# EAGLE board Round Rev3 (EAGLE 9.0.1)
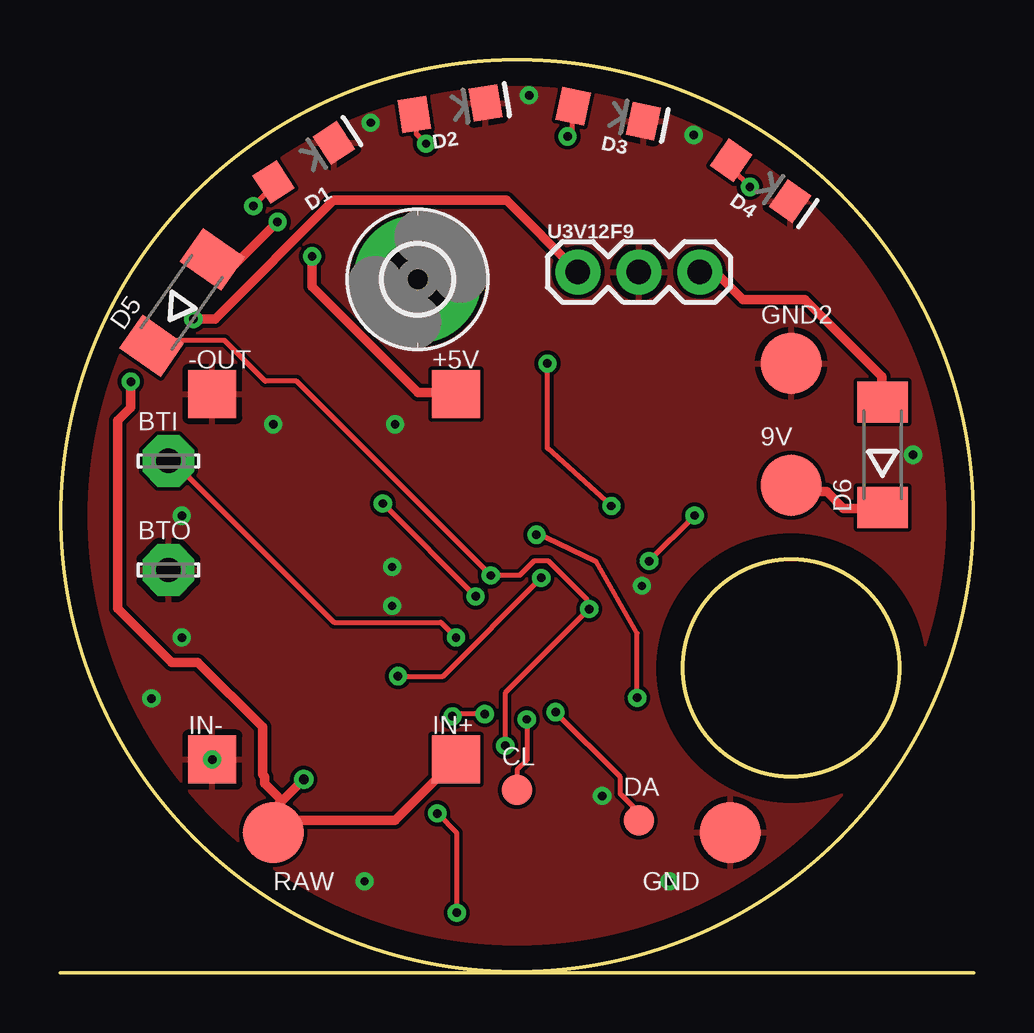
[diagram p0: board, top side]
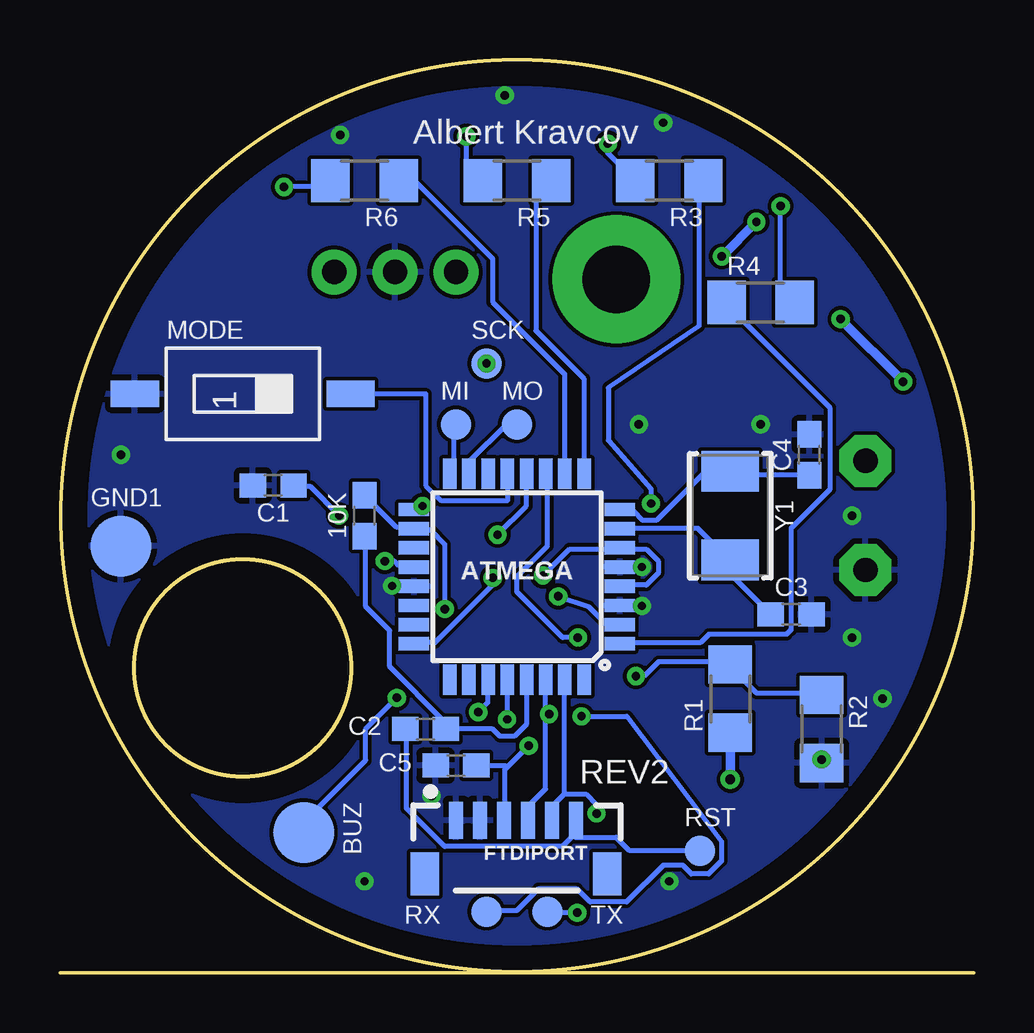
[diagram p1: board, bottom side, seen from below]

Size 38.1 x 38.05 mm. Coordinates in mm from the lower left corner, seen from the top.
Outline: circle at 19.05,19.05 radius 19
Outline: circle at 30.48,12.7 radius 4.52
Copper layers (1*16): Top 0.035mm / dielectric 1.5mm / Bottom 0.035mm
Design rules "default *": minimum track width 6mil, minimum drill 0.35mm, track to track 6mil, track to pad 6mil, pad to pad 6mil, via to via 6mil, smd to smd 6mil, copper to edge 40mil, drill to drill 6mil, minimum pad ring 10mil, minimum via ring 8mil, stop-mask expansion 4mil, vias tented up to drill 2mm, thermal gap 10mil
Net classes: 0 default: width 0.2 mm, drill 0.254 mm, clearance 0.16 mm; 1 power: width 0.4 mm, drill 0.254 mm, clearance 0.4 mm

## Footprints (pad centres in the part's own frame; a part is rotated, then mirrored left to right if it is on the bottom)
B2,54 = smd 2.54 x 2.54: TP 0,0
0603 = smd 1.1 x 1: 1 -0.85,0; 2 0.85,0
TP20SQ = smd 2 x 2: TP 0,0
TQFP32-08 = smd 1.27 x 0.559: 1 -4.293,2.8; 2 -4.293,2; 3 -4.293,1.2; 4 -4.293,0.4; 5 -4.293,-0.4; 6 -4.293,-1.2; 7 -4.293,-2; 8 -4.293,-2.8; 17 4.293,-2.8; 18 4.293,-2; 19 4.293,-1.2; 20 4.293,-0.4; 21 4.293,0.4; 22 4.293,1.2; 23 4.293,2; 24 4.293,2.8 | smd 0.559 x 1.27: 9 -2.8,-4.293; 10 -2,-4.293; 11 -1.2,-4.293; 12 -0.4,-4.293; 13 0.4,-4.293; 14 1.2,-4.293; 15 2,-4.293; 16 2.8,-4.293; 25 2.8,4.293; 26 2,4.293; 27 1.2,4.293; 28 0.4,4.293; 29 -0.4,4.293; 30 -1.2,4.293; 31 -2,4.293; 32 -2.8,4.293
LSP10 = drill 1.016 pad 2.159 octagon: MP 0,0
B1,27 = smd 1.27 x 1.27: TP 0,0
LED-1206 = smd 1.2 x 1.4: A -1.5,0; C 1.5,0
SOD106A-R = smd 1.7 x 2.1: A 2.2,0; C -2.2,0
1X06-1MM = smd 0.6 x 1.55: 1 -2.54,1.27; 2 -1.54,1.27; 3 -0.54,1.27; 4 0.46,1.27; 5 1.46,1.27; 6 2.46,1.27 | smd 1.2 x 1.8: P$1 -3.84,-0.955; P$2 3.76,-0.955
2,8-PAD = drill 2.8 pad 5.334: B2,8 0,0
SMS-001 = smd 1.092 x 2.007: 1 0,-4.496; 2 0,4.496
R1206 = smd 1.6 x 1.803: 1 -1.422,0; 2 1.422,0
1X03 = drill 1.016 pad 1.88: 1 0,0; 2 2.54,0; 3 5.08,0
CRYSTAL-SMD-5X3.2-2PAD = smd 1.7 x 2.4: P$1 1.85,0; P$2 -1.85,0

## Placement (x,y rotation side)
9V  TPB2,54  [B2,54]  30.48,20.32 0 top
10K  [0603]  25.4,19.05 90 bottom
+5V  TPTP20SQ  [TP20SQ]  16.51,24.13 0 top
-OUT  TPTP20SQ  [TP20SQ]  6.35,24.13 0 top
ATMEGA  ATMEGA328P_TQFP  [TQFP32-08]  19.05,16.51 180 bottom
BTI  LSP10  [LSP10]  4.52,21.34 0 top
BTO  LSP10  [LSP10]  4.52,16.79 0 top
BUZ  TPB2,54  [B2,54]  27.94,5.84 270 bottom
C1  100nF  [0603]  29.21,20.32 180 bottom
C2  0.1uF  [0603]  22.86,10.16 180 bottom
C3  18pF  [0603]  7.62,14.94 0 bottom
C4  18pF  [0603]  6.86,21.59 90 bottom
C5  100nF  [0603]  21.59,8.64 180 bottom
CL  TPB1,27  [B1,27]  19.05,7.62 0 top
D1  [LED-1206]  10.16,33.78 33 top
D2  [LED-1206]  16.26,36.02 9 top
D3  [LED-1206]  22.86,35.81 348 top
D4  [LED-1206]  29.21,33.02 325 top
D5  [SOD106A-R]  5.08,27.94 55 top
D6  [SOD106A-R]  34.29,21.59 90 top
DA  TPB1,27  [B1,27]  24.13,6.35 0 top
FTDIPORT  [1X06-1MM]  19.05,5.08 0 bottom
GND  TPB2,54  [B2,54]  27.94,5.84 270 top
GND1  TPB2,54  [B2,54]  35.56,17.78 0 bottom
GND2  TPB2,54  [B2,54]  30.48,25.4 0 top
H1  MOUNT-PAD-ROUND2.8  [2,8-PAD]  14.91,28.91 0 top
IN+  TPTP20SQ  [TP20SQ]  16.51,8.89 0 top
IN-  TPTP20SQ  [TP20SQ]  6.35,8.89 0 top
MI  TPB1,27  [B1,27]  21.59,22.86 0 bottom
MO  TPB1,27  [B1,27]  19.05,22.86 0 bottom
MODE  SWS001  [SMS-001]  30.48,24.13 270 bottom
R1  [R1206]  10.16,11.43 90 bottom
R2  [R1206]  6.35,10.16 270 bottom
R3  [R1206]  12.7,33.02 180 bottom
R4  [R1206]  8.89,27.94 0 bottom
R5  [R1206]  19.05,33.02 180 bottom
R6  [R1206]  25.4,33.02 180 bottom
RAW  TPB2,54  [B2,54]  8.89,5.84 270 top
RST  TPB1,27  [B1,27]  11.43,5.08 0 bottom
RX  TPB1,27  [B1,27]  20.32,2.54 0 bottom
SCK  TPB1,27  [B1,27]  20.32,25.4 0 bottom
TX  TPB1,27  [B1,27]  17.78,2.54 0 bottom
U3V12F9  [1X03]  21.59,29.21 0 top
Y1  16MHz  [CRYSTAL-SMD-5X3.2-2PAD]  10.16,19.05 270 bottom

## Library data of the parts
9V +5V -OUT BUZ CL DA GND GND1 GND2 IN+ IN- MI MO RAW RST RX TX = testpad
10K = SparkFun-Resistors; PROD_ID: RES-08787
ATMEGA = SparkFun-IC-Microcontroller; PROD_ID: IC-09069
BTI BTO = solpad
C1-C5 = SparkFun-Capacitors; PROD_ID: CAP-00867
D1-D4 = SparkFun-LED
D5 D6 = diode
FTDIPORT = SparkFun-Connectors; PROD_ID: CONN-08249; SF_ID: GPS-00579
H1 = holes
MODE = smd-special
R1-R6 = Clean-Kong
SCK = testpad; TP_SIGNAL_NAME: SCK
U3V12F9 = SparkFun-Connectors
Y1 = SparkFun-Clocks

## Nets
5V_PROTECTED [power]: 10K.2 ATMEGA.4 ATMEGA.6 ATMEGA.18 C5.1 D5.C FTDIPORT.3
9VOUT [power]: D6.A U3V12F9.3
AREF: ATMEGA.20 C1.1
BUTTON: ATMEGA.11 BTI.MP
BUZZER: ATMEGA.12 BUZ.TP
DTR: C2.2 FTDIPORT.6 RST.TP
GND: -OUT.TP ATMEGA.3 ATMEGA.5 ATMEGA.21 BTO.MP C1.2 C3.2 C4.2 C5.2 D1.C D2.C D3.C D4.C FTDIPORT.1 FTDIPORT.2 GND1.TP GND2.TP GND.TP IN-.TP MODE.1 R2.2 U3V12F9.2
GREEN1: D2.A R3.2
GREEN2: D3.A R5.2
GREEN3: D4.A R6.2
LED1: ATMEGA.1 R4.1
LED2: ATMEGA.2 R3.1
LED3: ATMEGA.9 R5.1
LED4: ATMEGA.10 R6.1
MI: ATMEGA.16 MI.TP
MO: ATMEGA.15 MO.TP
MODESENS: ATMEGA.24 R1.2 R2.1
N$1 [power]: +5V.TP D5.A
N$2: ATMEGA.13 MODE.2
N$21 [power]: 9V.TP D6.C
RAW [power]: IN+.TP R1.1 RAW.TP U3V12F9.1
RED: D1.A R4.2
RESET: 10K.1 ATMEGA.29 C2.1
RXD: ATMEGA.30 FTDIPORT.4 RX.TP
SCK: ATMEGA.17 SCK.TP
SCL: ATMEGA.28 CL.TP
SDA: ATMEGA.27 DA.TP
TXD: ATMEGA.31 FTDIPORT.5 TX.TP
XTAL1: ATMEGA.7 C3.1 Y1.P$1
XTAL2: ATMEGA.8 C4.1 Y1.P$2

## Tracks (layer width: path | path; a pad name or v marks a point on that pad's centre or on a via)
5V_PROTECTED  (via drill 0.35)
  Top 0.2: v18.56,9.46 18.56,11.66 v22.06,15.16 21.96,15.16 21.96,15.56 20.36,17.16 19.76,17.16 19.16,16.56 v17.96,16.56 9.86,24.66 8.56,24.66 6.86,26.36 4.76,26.36 4.57,26.17 3.85,26.17 D5.C
  Bottom 0.2: v18.56,9.46 19.46,8.57 | 19.46,8.57 19.56,8.46 19.56,6.36 FTDIPORT.3 | v22.06,15.16 22.06,17.86 22.66,18.46 23.26,18.46 23.29,18.52 ATMEGA.18 23.36,18.56 24.06,18.56 10K.2 | 14.83,17.66 16.86,17.66 v17.96,16.56 | 14.83,17.66 14.76,17.66 | ATMEGA.4 14.66,16.16 13.66,16.16 13.16,16.66 13.16,17.16 13.66,17.66 14.66,17.66 ATMEGA.6 14.83,17.71 14.83,17.66 | C5.1 20.68,8.62 19.51,8.62 19.46,8.57
9VOUT
  Top 0.4: D6.A 34.26,23.86 34.26,24.86 31.06,28.06 28.46,28.06 27.36,29.16 26.76,29.16 U3V12F9.3
AREF  (via drill 0.35)
  Top 0.2: v24.56,17.16 v26.46,19.06
  Bottom 0.2: v26.46,19.06 27.66,20.26 28.36,20.26 C1.1 | v24.56,17.16 24.16,17.16 23.96,16.96 23.36,16.96 ATMEGA.20
BUTTON  (via drill 0.35)
  Top 0.2: v16.51,13.97 15.88,14.61 11.43,14.61 5.08,20.96 BTI.MP
  Bottom 0.2: v16.51,13.97 17.14,13.97 19.05,15.88 19.05,16.51 17.78,17.78 17.78,20.32 ATMEGA.11
BUZZER  (via drill 0.35)
  Top 0.2: v19.86,18.26 19.72,18.4 22.36,17.13 24.06,14.16 v24.06,11.46
  Bottom 0.2: v19.86,18.26 18.66,19.46 18.66,20.76 ATMEGA.12 | v24.06,11.46 25.36,10.16 25.36,8.86 27.86,6.36 BUZ.TP
DTR
  Bottom 0.2: 23.66,10.15 23.66,6.86 22.06,5.26 17.16,5.26 16.66,5.76 16.66,6.26 FTDIPORT.6 16.63,5.65 14.92,5.65 14.38,5.11 11.51,5.11 RST.TP | 23.66,10.15 23.66,10.16 | C2.2 23.74,10.15 23.66,10.15
GND  (via drill 0.33, 0.35)
  other vias: 12.95,35.43 19.56,36.58 12.7,3.81 26.42,34.93 25.4,3.81 35.56,21.59 13.84,15.29 13.84,16.92 24.26,16.13 22.61,7.37 6.35,8.89 5.08,19.05 5.08,13.97 8.89,22.86 13.97,22.86 3.81,11.43
  pour Top: -5.08,41.91 40.64,41.91 40.64,-3.81 -5.08,-3.81
  pour Bottom: -3.81,40.64 41.91,40.64 41.91,-2.54 -3.81,-2.54
GREEN1  (via drill 0.35)
  Top 0.2: v15.26,34.56 14.86,34.96 14.86,35.76 D2.A
  Bottom 0.2: v15.26,34.56 15.26,34.16 14.16,33.06 R3.2
GREEN2  (via drill 0.35)
  Top 0.2: v21.16,34.86 21.36,35.06 21.36,36.06 D3.A
  Bottom 0.2: v21.16,34.86 21.16,33.66 20.56,33.06 R5.2
GREEN3  (via drill 0.35)
  Top 0.2: v28.76,32.76 28.06,33.46 28.06,33.86 D4.A
  Bottom 0.2: v28.76,32.76 27.06,32.76 26.86,32.96 R6.2
LED1
  Bottom 0.2: 14.66,13.76 ATMEGA.1 14.56,13.75 11.41,13.75 11.05,14.11 7.81,14.11 7.63,14.29 7.63,18.52 6.01,20.14 6.01,23.56 10.24,27.79 R4.1 10.26,27.86
LED2  (via drill 0.35)
  Top 0.2: v13.46,19.56 v17.33,15.69
  Bottom 0.2: v17.33,15.69 16.06,15.26 15.36,14.56 14.76,14.56 ATMEGA.2 | v13.46,19.56 13.46,20.16 15.24,22.19 15.24,24.39 11.46,26.96 11.46,32.86 11.36,32.96 R3.1
LED3
  Bottom 0.2: ATMEGA.9 16.26,20.86 16.26,24.76 18.26,26.76 18.26,32.36 17.66,32.96 R5.1
LED4
  Bottom 0.2: ATMEGA.10 17.06,20.86 17.06,24.96 20.06,27.96 20.06,29.76 23.26,32.96 23.96,32.96 R6.1
MI
  Bottom 0.2: MI.TP 21.67,22.84 21.67,21.04 21.85,20.86 ATMEGA.16
MO
  Bottom 0.2: ATMEGA.15 21.04,20.86 21.04,21.31 19.51,22.84 19.06,22.84 MO.TP
MODESENS  (via drill 0.35)
  Top 0.2: v20.06,16.46 15.96,12.36 v14.09,12.36
  Bottom 0.2: v20.06,16.46 20.06,16.16 22.46,13.76 23.26,13.76 ATMEGA.24 | v14.09,12.36 13.76,12.36 13.16,12.96 10.26,12.96 R1.2 10.16,12.76 9.06,11.66 6.36,11.66 R2.1
N$1  (via drill 0.35)
  Top 0.4: D5.A 6.28,29.68 6.28,29.32 6.35,29.21 | 6.64,29.05 D5.A | v10.51,29.86 10.51,28.6 14.92,24.19 16.45,24.19 +5V.TP | v9.07,31.3 6.82,29.05 D5.A
  Bottom 0.4: v9.07,31.3 v10.51,29.86
N$2
  Bottom 0.2: ATMEGA.13 19.43,19.69 22.23,19.69 22.86,20.32 22.86,24.13 MODE.2
N$21
  Top 0.4: D6.C 34.26,19.36 32.66,19.36 31.96,20.06 31.66,20.06 31.46,20.26 30.56,20.26 9V.TP
RAW  (via drill 0.35, 0.4)
  Top 0.4: 9.27,7.17 8.96,6.86 8.96,6.36 RAW.TP 8.89,6.35 13.97,6.35 IN+.TP | 9.27,7.17 v10.16,8.06 | 9.27,7.17 8.53,7.9 8.53,8.17 8.44,8.26 8.44,10.24 5.74,12.94 4.66,12.94 2.41,15.19 2.41,23.02 2.95,23.56 v2.95,24.64 | v5.56,27.25 6.46,27.25 11.41,32.2 18.61,32.2 21.58,29.23 U3V12F9.1
  Bottom 0.4: R1.1 10.15,9.97 10.15,8.08 v10.16,8.06 | v5.56,27.25 v2.95,24.64
RED  (via drill 0.35)
  Top 0.2: v8.06,31.96 8.86,32.76 8.86,32.96 D1.A
  Bottom 0.2: v8.06,31.96 8.06,28.46 7.56,27.96 R4.2
RESET
  Bottom 0.2: ATMEGA.29 18.66,12.16 18.66,10.36 19.16,9.86 19.76,9.86 20.06,10.16 C2.1 22.06,10.16 22.06,10.46 24.36,12.76 24.36,14.26 25.36,15.26 25.36,18.16 10K.1
RXD  (via drill 0.35)
  Top 0.2: v16.36,10.69 16.45,10.78 v17.71,10.78
  Bottom 0.2: 17.86,10.78 17.86,7.66 18.56,6.96 18.56,6.36 FTDIPORT.4 | 17.86,10.78 17.86,12.16 ATMEGA.30 | v16.36,10.69 14.47,10.69 10.52,5.47 10.52,4.66 11.06,4.12 11.78,4.12 12.14,4.48 12.95,4.48 14.48,2.95 16,2.95 16.54,3.49 18.16,3.49 19.06,2.59 20.32,2.59 RX.TP | 17.86,10.78 v17.71,10.78
SCK  (via drill 0.35)
  Top 0.2: v22.99,19.46 20.32,21.87 SCK.TP
  Bottom 0.152: ATMEGA.17 v22.99,19.46
  other vias: 20.32,25.4
SCL  (via drill 0.35)
  Top 0.2: v19.46,10.56 19.46,8.86 19.06,8.46 19.06,7.66 CL.TP
  Bottom 0.2: v19.46,10.56 19.46,12.16 ATMEGA.28
SDA  (via drill 0.35)
  Top 0.2: v20.66,10.86 23.36,8.16 23.36,7.46 24.06,6.76 24.06,6.36 DA.TP
  Bottom 0.2: v20.66,10.86 20.26,11.26 20.26,12.16 ATMEGA.27
TXD  (via drill 0.35)
  Top 0.2: v16.54,2.5 16.54,5.83 v15.73,6.64
  Bottom 0.2: 17.06,7.46 17.06,12.16 ATMEGA.31 | 17.06,7.46 17.56,6.96 17.56,6.36 FTDIPORT.5 | v16.54,2.5 17.71,2.5 TX.TP | v15.73,6.64 15.73,7 16.18,7.45 16.99,7.45 17.06,7.46
XTAL1
  Bottom 0.2: 14.74,18.52 ATMEGA.7 14.65,18.52 11.5,18.52 10.24,17.26 Y1.P$1 10.16,16.62 C3.1
XTAL2
  Bottom 0.2: 14.83,19.33 ATMEGA.8 | 14.92,19.33 ATMEGA.8 | C4.1 10,20.74 Y1.P$2 10.24,20.86 11.23,20.86 13.21,18.88 13.84,18.88 14.2,19.24 14.74,19.24 ATMEGA.8

## Text on the board
bPlace: Albert Kravcov | REV2